# EAGLE board RS485_Breakout-Panel-v10 (EAGLE 6.6.0)
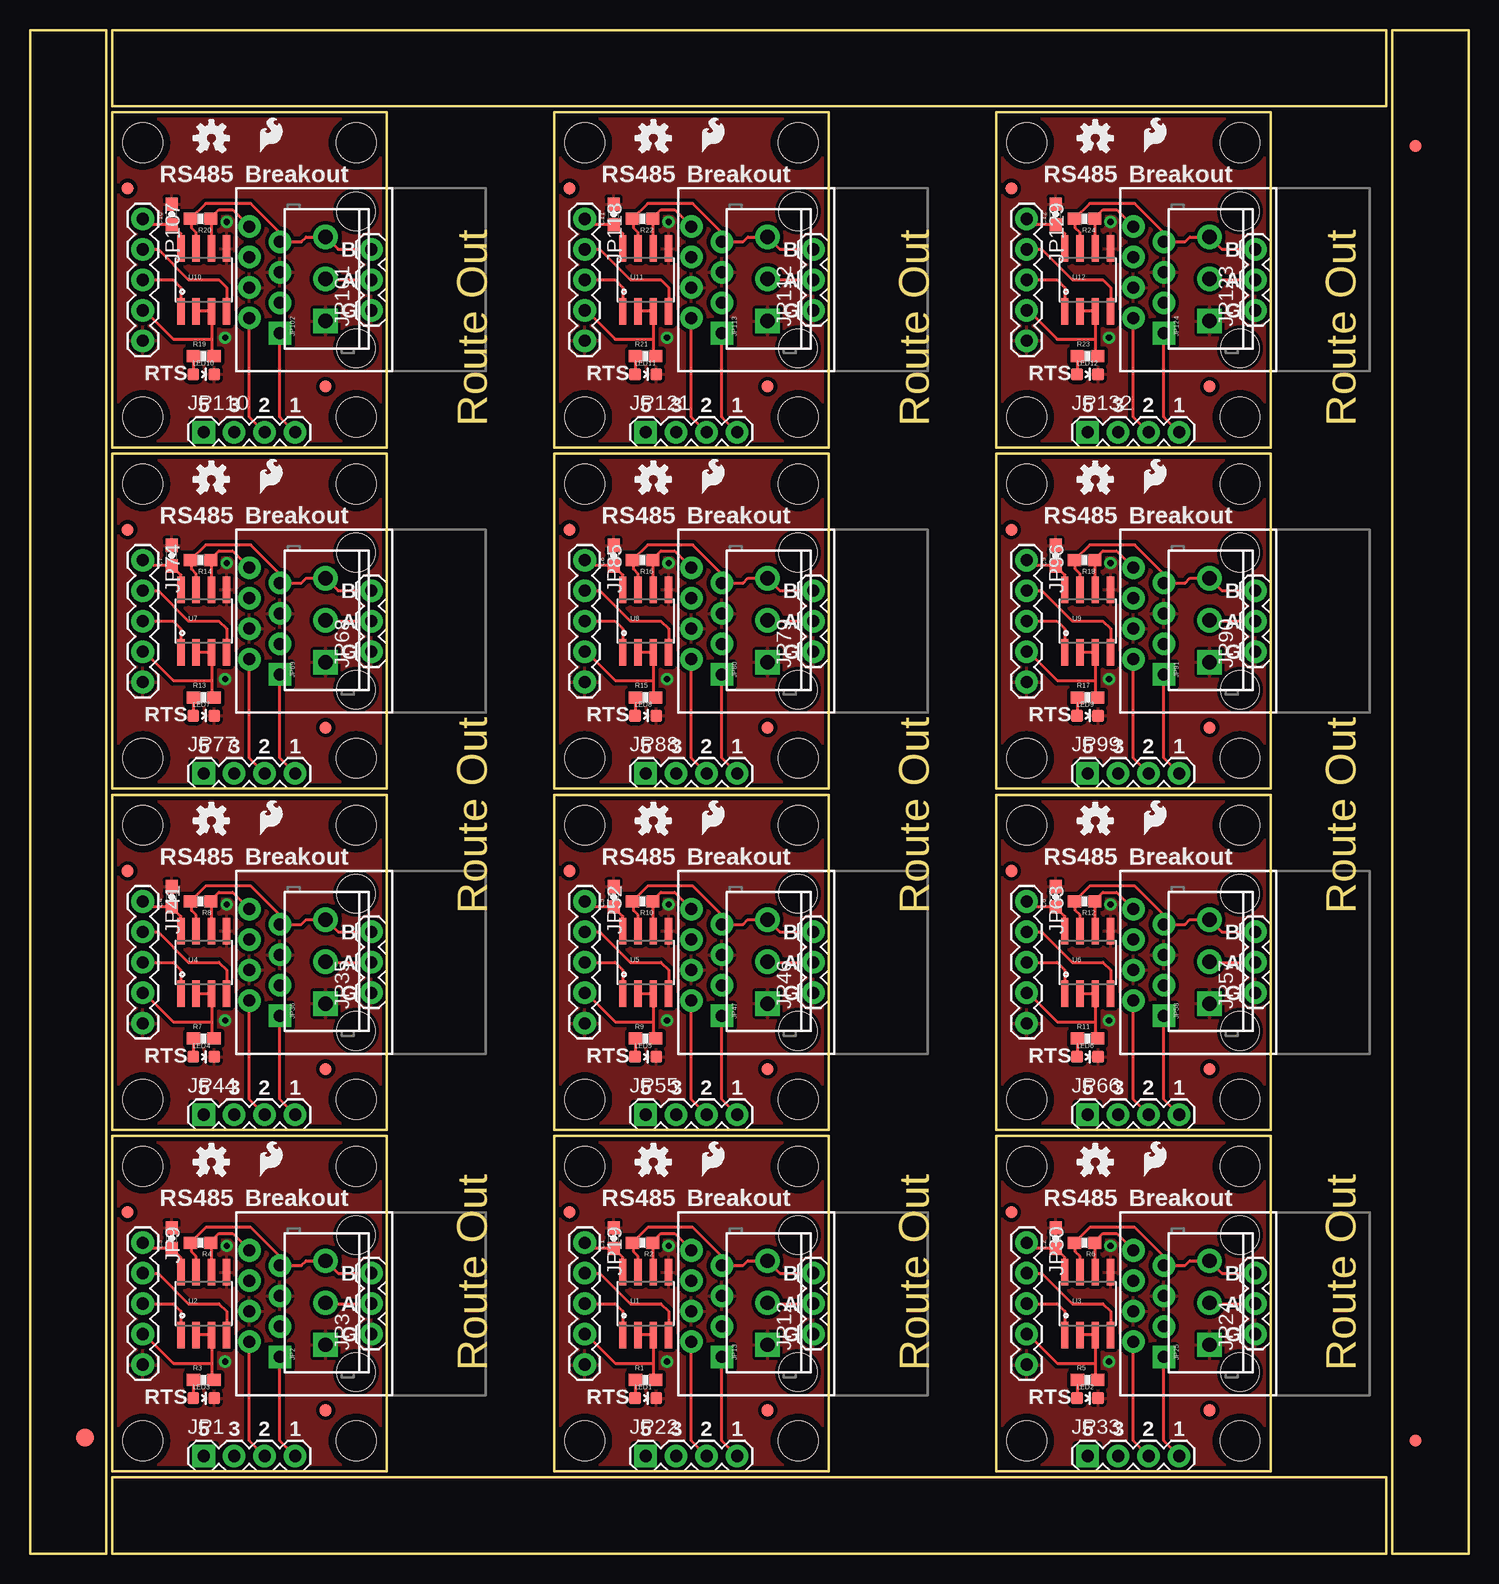
[diagram p0: board, top side]
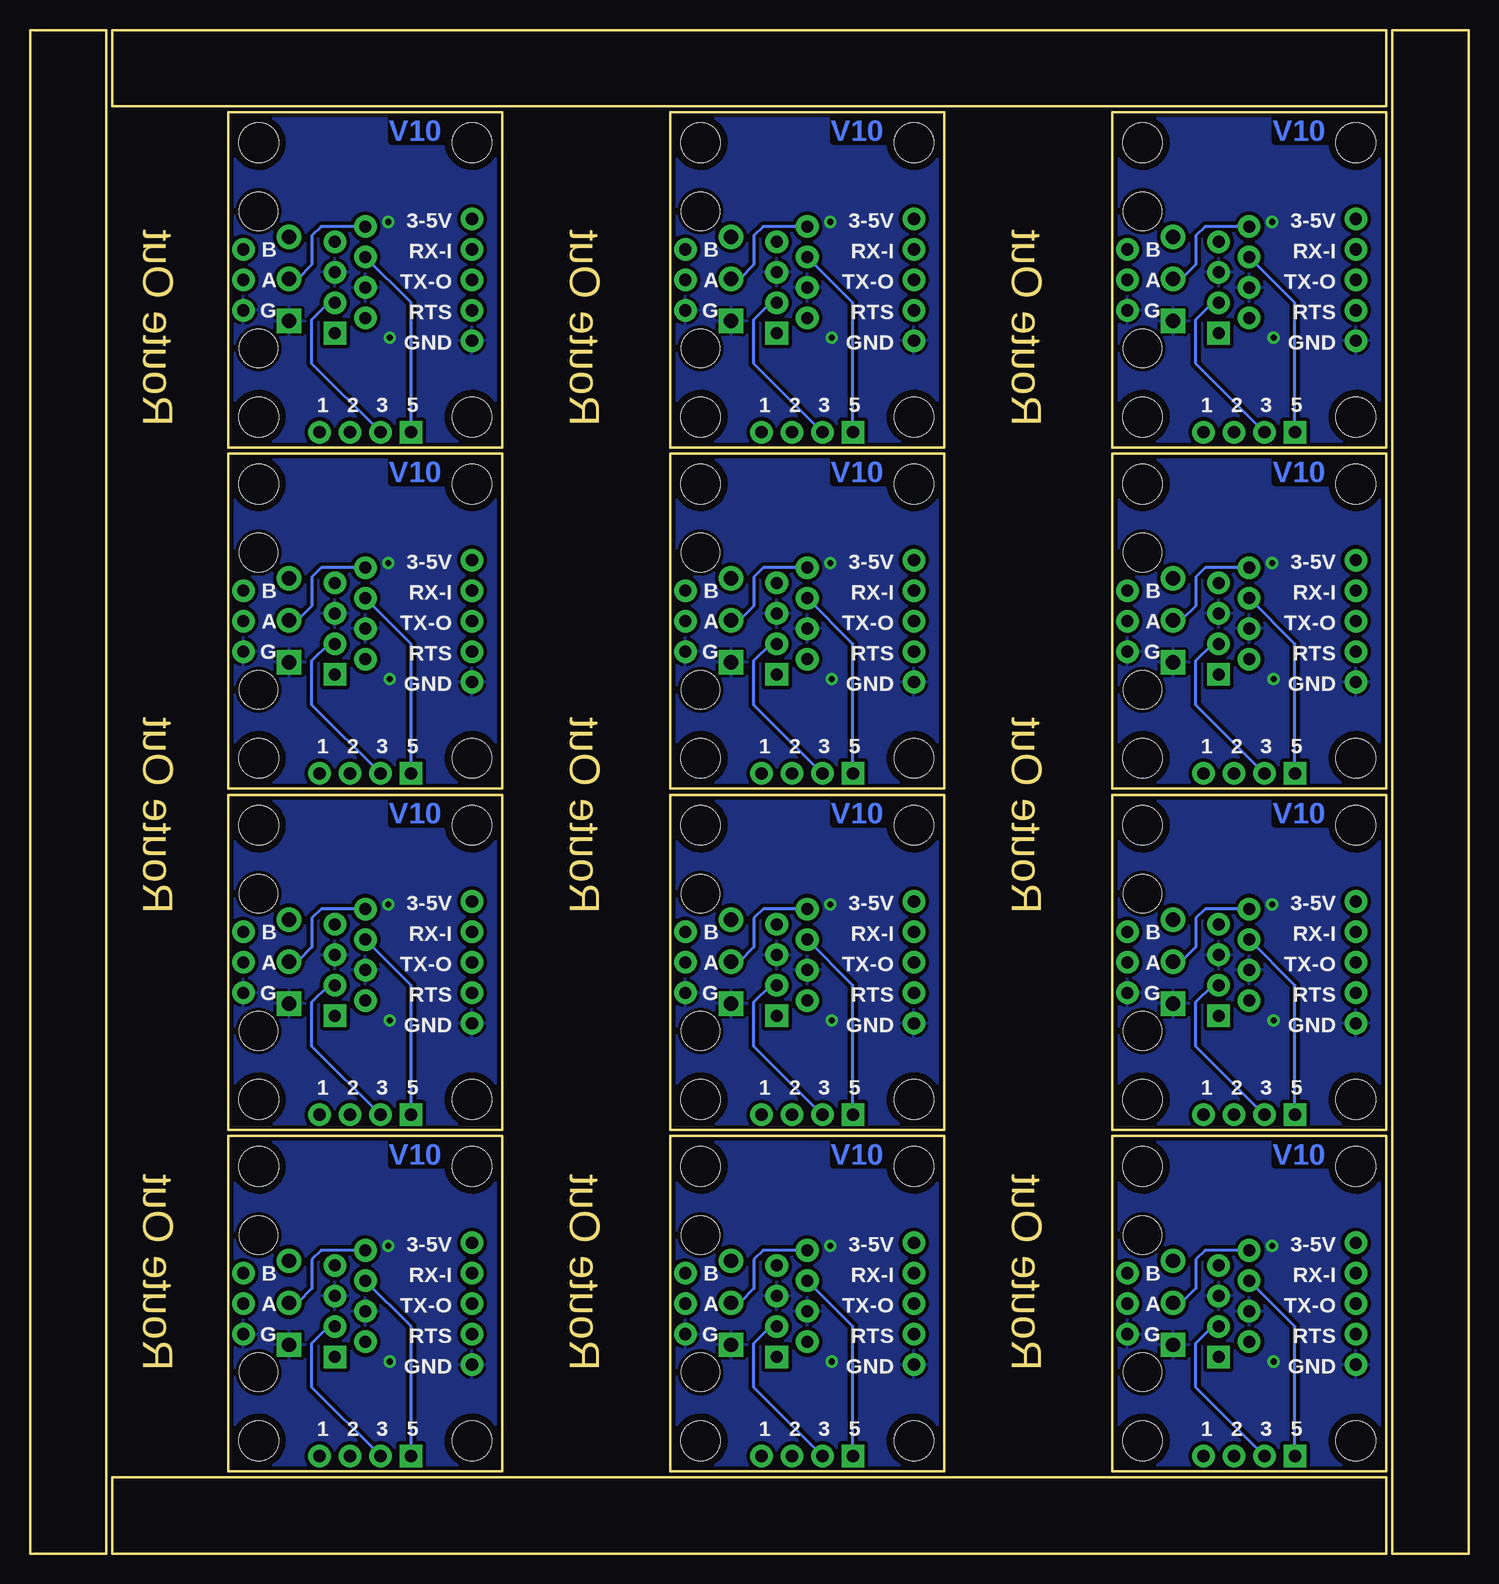
[diagram p1: board, bottom side, seen from below]

Size 119.89 x 127 mm. Coordinates in mm from the lower left corner, seen from the top.
Outline: 29.72,6.86 6.86,6.86 6.86,34.8 29.72,34.8 29.72,6.86
Outline: 66.55,6.86 43.69,6.86 43.69,34.8 66.55,34.8 66.55,6.86
Outline: 103.38,6.86 80.52,6.86 80.52,34.8 103.38,34.8 103.38,6.86
Outline: 29.72,35.31 6.86,35.31 6.86,63.25 29.72,63.25 29.72,35.31
Outline: 66.55,35.31 43.69,35.31 43.69,63.25 66.55,63.25 66.55,35.31
Outline: 103.38,35.31 80.52,35.31 80.52,63.25 103.38,63.25 103.38,35.31
Outline: 29.72,63.75 6.86,63.75 6.86,91.69 29.72,91.69 29.72,63.75
Outline: 66.55,63.75 43.69,63.75 43.69,91.69 66.55,91.69 66.55,63.75
Outline: 103.38,63.75 80.52,63.75 80.52,91.69 103.38,91.69 103.38,63.75
Outline: 29.72,92.2 6.86,92.2 6.86,120.14 29.72,120.14 29.72,92.2
Outline: 66.55,92.2 43.69,92.2 43.69,120.14 66.55,120.14 66.55,92.2
Outline: 103.38,92.2 80.52,92.2 80.52,120.14 103.38,120.14 103.38,92.2
Outline: 6.35,0 6.35,127 0,127 0,0 6.35,0
Outline: 6.86,0 113.03,0 113.03,6.35 6.86,6.35 6.86,0
Outline: 113.03,127 6.86,127 6.86,120.65 113.03,120.65 113.03,127
Outline: 119.89,0 119.89,127 113.54,127 113.54,0 119.89,0
Copper layers (1*16): Top 0.035mm / dielectric 1.5mm / Bottom 0.035mm
Design rules "SparkFun": minimum track width 8mil, minimum drill 20mil, track to track 8mil, track to pad 8mil, pad to pad 8mil, via to via 8mil, smd to smd 8mil, copper to edge 10mil, drill to drill 8mil, minimum pad ring 12mil, minimum via ring 10mil, stop-mask expansion 4mil, vias tented up to drill 20mil, thermal gap 10mil
Net classes: 0 default: width 0.203 mm; 1 power: width 0.254 mm

## Footprints (pad centres in the part's own frame; a part is rotated, then mirrored left to right if it is on the bottom)
0603-CAP = smd 1.1 x 1: 1 -0.85,0; 2 0.85,0
FIDUCIAL-1.5X3 = smd 1.5 x 1.5: 1 0,0
FIDUCIAL-1X2 = smd 1 x 1: 1 0,0
1X04 = drill 1.016 pad 1.88 square: 1 0,0 | drill 1.016 pad 1.88: 2 2.54,0; 3 5.08,0; 4 7.62,0
SCREWTERMINAL-3.5MM-3 = drill 1.2 pad 2.032 square: 1 0,0 | drill 1.2 pad 2.032: 2 3.5,0; 3 7,0
1X03 = drill 1.016 pad 1.88: 1 0,0; 2 2.54,0; 3 5.08,0
RJ45-8 = drill 1 pad 1.88 square: 1 -4.445,6.35 | drill 1 pad 1.88: 2 -3.175,8.89; 3 -1.905,6.35; 4 -0.635,8.89; 5 0.635,6.35; 6 1.905,8.89; 7 3.175,6.35; 8 4.445,8.89 | hole 3.2: -5.715,0; 5.715,0
STAND-OFF = hole 3.302: 0,0
1X05 = drill 1.016 pad 1.88: 1 0,0; 2 2.54,0; 3 5.08,0; 4 7.62,0; 5 10.16,0
LED-0603 = smd 1 x 1: A 0,-0.877; C 0,0.877
0603-RES = smd 1.1 x 1: 1 -0.85,0; 2 0.85,0
SO08 = smd 0.61 x 2.21: 1 -1.905,-2.616; 2 -0.635,-2.616; 3 0.635,-2.616; 4 1.905,-2.616; 5 1.905,2.616; 6 0.635,2.616; 7 -0.635,2.616; 8 -1.905,2.616

## Placement (x,y rotation side)
C1  0.1uF  [0603-CAP]  48.64,26.29 90 top
C2  0.1uF  [0603-CAP]  85.47,26.29 90 top
C3  0.1uF  [0603-CAP]  11.81,26.29 90 top
C4  0.1uF  [0603-CAP]  11.81,54.74 90 top
C5  0.1uF  [0603-CAP]  48.64,54.74 90 top
C6  0.1uF  [0603-CAP]  85.47,54.74 90 top
C7  0.1uF  [0603-CAP]  11.81,83.19 90 top
C8  0.1uF  [0603-CAP]  48.64,83.19 90 top
C9  0.1uF  [0603-CAP]  85.47,83.19 90 top
C10  0.1uF  [0603-CAP]  11.81,111.63 90 top
C11  0.1uF  [0603-CAP]  48.64,111.63 90 top
C12  0.1uF  [0603-CAP]  85.47,111.63 90 top
E$1  [FIDUCIAL-1.5X3]  4.57,9.65 0 top
E$7  [FIDUCIAL-1X2]  115.44,9.4 0 top
E$8  [FIDUCIAL-1X2]  115.44,117.35 180 top
JP1  [1X04]  14.48,8.13 0 top
JP2  [SCREWTERMINAL-3.5MM-3]  24.64,17.4 90 top
JP3  [1X03]  28.45,18.29 90 top
JP4  RJ45-8PTH  [RJ45-8]  27.18,20.83 90 top
JP5  FIDUCIAL1X2  [FIDUCIAL-1X2]  24.64,11.94 0 top
JP6  STAND-OFF  [STAND-OFF]  9.4,9.4 0 top
JP7  STAND-OFF  [STAND-OFF]  27.18,32.26 0 top
JP8  STAND-OFF  [STAND-OFF]  27.18,9.4 0 top
JP9  [1X05]  9.4,25.91 270 top
JP10  FIDUCIAL1X2  [FIDUCIAL-1X2]  8.13,28.45 0 top
JP11  RJ45-8PTH  [RJ45-8]  64.01,20.83 90 top
JP12  [1X03]  65.28,18.29 90 top
JP13  [SCREWTERMINAL-3.5MM-3]  61.47,17.4 90 top
JP14  STAND-OFF  [STAND-OFF]  46.23,32.26 0 top
JP15  STAND-OFF  [STAND-OFF]  9.4,32.26 0 top
JP16  STAND-OFF  [STAND-OFF]  46.23,9.4 0 top
JP17  STAND-OFF  [STAND-OFF]  64.01,32.26 0 top
JP18  STAND-OFF  [STAND-OFF]  64.01,9.4 0 top
JP19  [1X05]  46.23,25.91 270 top
JP20  FIDUCIAL1X2  [FIDUCIAL-1X2]  61.47,11.94 0 top
JP21  FIDUCIAL1X2  [FIDUCIAL-1X2]  44.96,28.45 0 top
JP22  [1X04]  51.31,8.13 0 top
JP23  RJ45-8PTH  [RJ45-8]  100.84,20.83 90 top
JP24  [1X03]  102.11,18.29 90 top
JP25  [SCREWTERMINAL-3.5MM-3]  98.3,17.4 90 top
JP26  STAND-OFF  [STAND-OFF]  83.06,32.26 0 top
JP27  STAND-OFF  [STAND-OFF]  83.06,9.4 0 top
JP28  STAND-OFF  [STAND-OFF]  100.84,32.26 0 top
JP29  STAND-OFF  [STAND-OFF]  100.84,9.4 0 top
JP30  [1X05]  83.06,25.91 270 top
JP31  FIDUCIAL1X2  [FIDUCIAL-1X2]  98.3,11.94 0 top
JP32  FIDUCIAL1X2  [FIDUCIAL-1X2]  81.79,28.45 0 top
JP33  [1X04]  88.14,8.13 0 top
JP34  RJ45-8PTH  [RJ45-8]  27.18,49.28 90 top
JP35  [1X03]  28.45,46.74 90 top
JP36  [SCREWTERMINAL-3.5MM-3]  24.64,45.85 90 top
JP37  STAND-OFF  [STAND-OFF]  9.4,60.71 0 top
JP38  STAND-OFF  [STAND-OFF]  9.4,37.85 0 top
JP39  STAND-OFF  [STAND-OFF]  27.18,60.71 0 top
JP40  STAND-OFF  [STAND-OFF]  27.18,37.85 0 top
JP41  [1X05]  9.4,54.36 270 top
JP42  FIDUCIAL1X2  [FIDUCIAL-1X2]  24.64,40.39 0 top
JP43  FIDUCIAL1X2  [FIDUCIAL-1X2]  8.13,56.9 0 top
JP44  [1X04]  14.48,36.58 0 top
JP45  RJ45-8PTH  [RJ45-8]  64.01,49.28 90 top
JP46  [1X03]  65.28,46.74 90 top
JP47  [SCREWTERMINAL-3.5MM-3]  61.47,45.85 90 top
JP48  STAND-OFF  [STAND-OFF]  46.23,60.71 0 top
JP49  STAND-OFF  [STAND-OFF]  46.23,37.85 0 top
JP50  STAND-OFF  [STAND-OFF]  64.01,60.71 0 top
JP51  STAND-OFF  [STAND-OFF]  64.01,37.85 0 top
JP52  [1X05]  46.23,54.36 270 top
JP53  FIDUCIAL1X2  [FIDUCIAL-1X2]  61.47,40.39 0 top
JP54  FIDUCIAL1X2  [FIDUCIAL-1X2]  44.96,56.9 0 top
JP55  [1X04]  51.31,36.58 0 top
JP56  RJ45-8PTH  [RJ45-8]  100.84,49.28 90 top
JP57  [1X03]  102.11,46.74 90 top
JP58  [SCREWTERMINAL-3.5MM-3]  98.3,45.85 90 top
JP59  STAND-OFF  [STAND-OFF]  83.06,60.71 0 top
JP60  STAND-OFF  [STAND-OFF]  83.06,37.85 0 top
JP61  STAND-OFF  [STAND-OFF]  100.84,60.71 0 top
JP62  STAND-OFF  [STAND-OFF]  100.84,37.85 0 top
JP63  [1X05]  83.06,54.36 270 top
JP64  FIDUCIAL1X2  [FIDUCIAL-1X2]  98.3,40.39 0 top
JP65  FIDUCIAL1X2  [FIDUCIAL-1X2]  81.79,56.9 0 top
JP66  [1X04]  88.14,36.58 0 top
JP67  RJ45-8PTH  [RJ45-8]  27.18,77.72 90 top
JP68  [1X03]  28.45,75.18 90 top
JP69  [SCREWTERMINAL-3.5MM-3]  24.64,74.3 90 top
JP70  STAND-OFF  [STAND-OFF]  9.4,89.15 0 top
JP71  STAND-OFF  [STAND-OFF]  9.4,66.29 0 top
JP72  STAND-OFF  [STAND-OFF]  27.18,89.15 0 top
JP73  STAND-OFF  [STAND-OFF]  27.18,66.29 0 top
JP74  [1X05]  9.4,82.8 270 top
JP75  FIDUCIAL1X2  [FIDUCIAL-1X2]  24.64,68.83 0 top
JP76  FIDUCIAL1X2  [FIDUCIAL-1X2]  8.13,85.34 0 top
JP77  [1X04]  14.48,65.02 0 top
JP78  RJ45-8PTH  [RJ45-8]  64.01,77.72 90 top
JP79  [1X03]  65.28,75.18 90 top
JP80  [SCREWTERMINAL-3.5MM-3]  61.47,74.3 90 top
JP81  STAND-OFF  [STAND-OFF]  46.23,89.15 0 top
JP82  STAND-OFF  [STAND-OFF]  46.23,66.29 0 top
JP83  STAND-OFF  [STAND-OFF]  64.01,89.15 0 top
JP84  STAND-OFF  [STAND-OFF]  64.01,66.29 0 top
JP85  [1X05]  46.23,82.8 270 top
JP86  FIDUCIAL1X2  [FIDUCIAL-1X2]  61.47,68.83 0 top
JP87  FIDUCIAL1X2  [FIDUCIAL-1X2]  44.96,85.34 0 top
JP88  [1X04]  51.31,65.02 0 top
JP89  RJ45-8PTH  [RJ45-8]  100.84,77.72 90 top
JP90  [1X03]  102.11,75.18 90 top
JP91  [SCREWTERMINAL-3.5MM-3]  98.3,74.3 90 top
JP92  STAND-OFF  [STAND-OFF]  83.06,89.15 0 top
JP93  STAND-OFF  [STAND-OFF]  83.06,66.29 0 top
JP94  STAND-OFF  [STAND-OFF]  100.84,89.15 0 top
JP95  STAND-OFF  [STAND-OFF]  100.84,66.29 0 top
JP96  [1X05]  83.06,82.8 270 top
JP97  FIDUCIAL1X2  [FIDUCIAL-1X2]  98.3,68.83 0 top
JP98  FIDUCIAL1X2  [FIDUCIAL-1X2]  81.79,85.34 0 top
JP99  [1X04]  88.14,65.02 0 top
JP100  RJ45-8PTH  [RJ45-8]  27.18,106.17 90 top
JP101  [1X03]  28.45,103.63 90 top
JP102  [SCREWTERMINAL-3.5MM-3]  24.64,102.74 90 top
JP103  STAND-OFF  [STAND-OFF]  9.4,117.6 0 top
JP104  STAND-OFF  [STAND-OFF]  9.4,94.74 0 top
JP105  STAND-OFF  [STAND-OFF]  27.18,117.6 0 top
JP106  STAND-OFF  [STAND-OFF]  27.18,94.74 0 top
JP107  [1X05]  9.4,111.25 270 top
JP108  FIDUCIAL1X2  [FIDUCIAL-1X2]  24.64,97.28 0 top
JP109  FIDUCIAL1X2  [FIDUCIAL-1X2]  8.13,113.79 0 top
JP110  [1X04]  14.48,93.47 0 top
JP111  RJ45-8PTH  [RJ45-8]  64.01,106.17 90 top
JP112  [1X03]  65.28,103.63 90 top
JP113  [SCREWTERMINAL-3.5MM-3]  61.47,102.74 90 top
JP114  STAND-OFF  [STAND-OFF]  46.23,117.6 0 top
JP115  STAND-OFF  [STAND-OFF]  46.23,94.74 0 top
JP116  STAND-OFF  [STAND-OFF]  64.01,117.6 0 top
JP117  STAND-OFF  [STAND-OFF]  64.01,94.74 0 top
JP118  [1X05]  46.23,111.25 270 top
JP119  FIDUCIAL1X2  [FIDUCIAL-1X2]  61.47,97.28 0 top
JP120  FIDUCIAL1X2  [FIDUCIAL-1X2]  44.96,113.79 0 top
JP121  [1X04]  51.31,93.47 0 top
JP122  RJ45-8PTH  [RJ45-8]  100.84,106.17 90 top
JP123  [1X03]  102.11,103.63 90 top
JP124  [SCREWTERMINAL-3.5MM-3]  98.3,102.74 90 top
JP125  STAND-OFF  [STAND-OFF]  83.06,117.6 0 top
JP126  STAND-OFF  [STAND-OFF]  83.06,94.74 0 top
JP127  STAND-OFF  [STAND-OFF]  100.84,117.6 0 top
JP128  STAND-OFF  [STAND-OFF]  100.84,94.74 0 top
JP129  [1X05]  83.06,111.25 270 top
JP130  FIDUCIAL1X2  [FIDUCIAL-1X2]  98.3,97.28 0 top
JP131  FIDUCIAL1X2  [FIDUCIAL-1X2]  81.79,113.79 0 top
JP132  [1X04]  88.14,93.47 0 top
LED1  Green  [LED-0603]  51.31,12.95 270 top
LED2  Green  [LED-0603]  88.14,12.95 270 top
LED3  Green  [LED-0603]  14.48,12.95 270 top
LED4  Green  [LED-0603]  14.48,41.4 270 top
LED5  Green  [LED-0603]  51.31,41.4 270 top
LED6  Green  [LED-0603]  88.14,41.4 270 top
LED7  Green  [LED-0603]  14.48,69.85 270 top
LED8  Green  [LED-0603]  51.31,69.85 270 top
LED9  Green  [LED-0603]  88.14,69.85 270 top
LED10  Green  [LED-0603]  14.48,98.3 270 top
LED11  Green  [LED-0603]  51.31,98.3 270 top
LED12  Green  [LED-0603]  88.14,98.3 270 top
LOGO1  OSHW-LOGOS  [OSHW-LOGO-S]  15.11,32.64 0 top
LOGO2  OSHW-LOGOS  [OSHW-LOGO-S]  51.94,32.64 0 top
LOGO3  OSHW-LOGOS  [OSHW-LOGO-S]  88.77,32.64 0 top
LOGO4  OSHW-LOGOS  [OSHW-LOGO-S]  15.11,61.09 0 top
LOGO5  OSHW-LOGOS  [OSHW-LOGO-S]  51.94,61.09 0 top
LOGO6  OSHW-LOGOS  [OSHW-LOGO-S]  88.77,61.09 0 top
LOGO7  OSHW-LOGOS  [OSHW-LOGO-S]  15.11,89.53 0 top
LOGO8  OSHW-LOGOS  [OSHW-LOGO-S]  51.94,89.53 0 top
LOGO9  OSHW-LOGOS  [OSHW-LOGO-S]  88.77,89.53 0 top
LOGO10  OSHW-LOGOS  [OSHW-LOGO-S]  15.11,117.98 0 top
LOGO11  OSHW-LOGOS  [OSHW-LOGO-S]  51.94,117.98 0 top
LOGO12  OSHW-LOGOS  [OSHW-LOGO-S]  88.77,117.98 0 top
R1  330  [0603-RES]  51.31,14.48 0 top
R2  220  [0603-RES]  51.05,25.91 180 top
R3  330  [0603-RES]  14.48,14.48 0 top
R4  220  [0603-RES]  14.22,25.91 180 top
R5  330  [0603-RES]  88.14,14.48 0 top
R6  220  [0603-RES]  87.88,25.91 180 top
R7  330  [0603-RES]  14.48,42.93 0 top
R8  220  [0603-RES]  14.22,54.36 180 top
R9  330  [0603-RES]  51.31,42.93 0 top
R10  220  [0603-RES]  51.05,54.36 180 top
R11  330  [0603-RES]  88.14,42.93 0 top
R12  220  [0603-RES]  87.88,54.36 180 top
R13  330  [0603-RES]  14.48,71.37 0 top
R14  220  [0603-RES]  14.22,82.8 180 top
R15  330  [0603-RES]  51.31,71.37 0 top
R16  220  [0603-RES]  51.05,82.8 180 top
R17  330  [0603-RES]  88.14,71.37 0 top
R18  220  [0603-RES]  87.88,82.8 180 top
R19  330  [0603-RES]  14.48,99.82 0 top
R20  220  [0603-RES]  14.22,111.25 180 top
R21  330  [0603-RES]  51.31,99.82 0 top
R22  220  [0603-RES]  51.05,111.25 180 top
R23  330  [0603-RES]  88.14,99.82 0 top
R24  220  [0603-RES]  87.88,111.25 180 top
U1  RS485SOIC  [SO08]  51.31,20.83 0 top
U2  RS485SOIC  [SO08]  14.48,20.83 0 top
U3  RS485SOIC  [SO08]  88.14,20.83 0 top
U4  RS485SOIC  [SO08]  14.48,49.28 0 top
U5  RS485SOIC  [SO08]  51.31,49.28 0 top
U6  RS485SOIC  [SO08]  88.14,49.28 0 top
U7  RS485SOIC  [SO08]  14.48,77.72 0 top
U8  RS485SOIC  [SO08]  51.31,77.72 0 top
U9  RS485SOIC  [SO08]  88.14,77.72 0 top
U10  RS485SOIC  [SO08]  14.48,106.17 0 top
U11  RS485SOIC  [SO08]  51.31,106.17 0 top
U12  RS485SOIC  [SO08]  88.14,106.17 0 top
U$1  LOGO-SFESK  [SFE-LOGO-FLAME]  56.01,31.5 0 top
U$2  LOGO-SFESK  [SFE-LOGO-FLAME]  19.18,31.5 0 top
U$3  LOGO-SFESK  [SFE-LOGO-FLAME]  92.84,31.5 0 top
U$4  LOGO-SFESK  [SFE-LOGO-FLAME]  19.18,59.94 0 top
U$5  LOGO-SFESK  [SFE-LOGO-FLAME]  56.01,59.94 0 top
U$6  LOGO-SFESK  [SFE-LOGO-FLAME]  92.84,59.94 0 top
U$7  LOGO-SFESK  [SFE-LOGO-FLAME]  19.18,88.39 0 top
U$8  LOGO-SFESK  [SFE-LOGO-FLAME]  56.01,88.39 0 top
U$9  LOGO-SFESK  [SFE-LOGO-FLAME]  92.84,88.39 0 top
U$10  LOGO-SFESK  [SFE-LOGO-FLAME]  19.18,116.84 0 top
U$11  LOGO-SFESK  [SFE-LOGO-FLAME]  56.01,116.84 0 top
U$12  LOGO-SFESK  [SFE-LOGO-FLAME]  92.84,116.84 0 top

## Library data of the parts
C1-C12 = SparkFun-Capacitors; PROD_ID: CAP-00810
E$1 = SparkFun-Retired
E$7 E$8 LOGO1-LOGO12 = SparkFun-Aesthetics
JP1-JP132 U1-U12 U$1-U$12 = SparkFun
LED1-LED12 = SparkFun-LED; PROD_ID: DIO-00821
R1 R3 R5 R7 R9 R11 R13 R15 R17 R19 R21 R23 = SparkFun-Resistors; PROD_ID: RES-00818
R2 R4 R6 R8 R10 R12 R14 R16 R18 R20 R22 R24 = SparkFun-Resistors; PROD_ID: RES-08698

## Nets
1: JP1.4 JP4.1
2: JP1.3 JP4.2
3: JP1.2 JP4.3
4: JP11.1 JP22.4
5: JP1.1 JP4.6
6: JP11.2 JP22.3
7: JP11.3 JP22.2
8: JP11.6 JP22.1
9: JP23.1 JP33.4
10: JP23.2 JP33.3
11: JP23.3 JP33.2
12: JP23.6 JP33.1
13: JP34.1 JP44.4
14: JP34.2 JP44.3
15: JP34.3 JP44.2
16: JP34.6 JP44.1
17: JP45.1 JP55.4
18: JP45.2 JP55.3
19: JP45.3 JP55.2
20: JP45.6 JP55.1
21: JP56.1 JP66.4
22: JP56.2 JP66.3
23: JP56.3 JP66.2
24: JP56.6 JP66.1
25: JP67.1 JP77.4
26: JP67.2 JP77.3
27: JP67.3 JP77.2
28: JP67.6 JP77.1
29: JP78.1 JP88.4
30: JP78.2 JP88.3
31: JP78.3 JP88.2
32: JP78.6 JP88.1
33: JP89.1 JP99.4
34: JP89.2 JP99.3
35: JP89.3 JP99.2
36: JP89.6 JP99.1
37: JP100.1 JP110.4
38: JP100.2 JP110.3
39: JP100.3 JP110.2
40: JP100.6 JP110.1
41: JP111.1 JP121.4
42: JP111.2 JP121.3
43: JP111.3 JP121.2
44: JP111.6 JP121.1
45: JP122.1 JP132.4
46: JP122.2 JP132.3
47: JP122.3 JP132.2
48: JP122.6 JP132.1
A: JP2.2 JP3.2 JP4.8 R4.1 U2.6
A1: JP11.8 JP12.2 JP13.2 R2.1 U1.6
A2: JP23.8 JP24.2 JP25.2 R6.1 U3.6
A3: JP34.8 JP35.2 JP36.2 R8.1 U4.6
A4: JP45.8 JP46.2 JP47.2 R10.1 U5.6
A5: JP56.8 JP57.2 JP58.2 R12.1 U6.6
A6: JP67.8 JP68.2 JP69.2 R14.1 U7.6
A7: JP78.8 JP79.2 JP80.2 R16.1 U8.6
A8: JP89.8 JP90.2 JP91.2 R18.1 U9.6
A9: JP100.8 JP101.2 JP102.2 R20.1 U10.6
A10: JP111.8 JP112.2 JP113.2 R22.1 U11.6
A11: JP122.8 JP123.2 JP124.2 R24.1 U12.6
B: JP2.3 JP3.3 JP4.7 R4.2 U2.7
B1: JP11.7 JP12.3 JP13.3 R2.2 U1.7
B2: JP23.7 JP24.3 JP25.3 R6.2 U3.7
B3: JP34.7 JP35.3 JP36.3 R8.2 U4.7
B4: JP45.7 JP46.3 JP47.3 R10.2 U5.7
B5: JP56.7 JP57.3 JP58.3 R12.2 U6.7
B6: JP67.7 JP68.3 JP69.3 R14.2 U7.7
B7: JP78.7 JP79.3 JP80.3 R16.2 U8.7
B8: JP89.7 JP90.3 JP91.3 R18.2 U9.7
B9: JP100.7 JP101.3 JP102.3 R20.2 U10.7
B10: JP111.7 JP112.3 JP113.3 R22.2 U11.7
B11: JP122.7 JP123.3 JP124.3 R24.2 U12.7
GND [power]: C3.2 JP2.1 JP3.1 JP4.4 JP4.5 JP9.5 LED3.C U2.5
GND1 [power]: C1.2 JP11.4 JP11.5 JP12.1 JP13.1 JP19.5 LED1.C U1.5
GND2 [power]: C2.2 JP23.4 JP23.5 JP24.1 JP25.1 JP30.5 LED2.C U3.5
GND3 [power]: C4.2 JP34.4 JP34.5 JP35.1 JP36.1 JP41.5 LED4.C U4.5
GND4 [power]: C5.2 JP45.4 JP45.5 JP46.1 JP47.1 JP52.5 LED5.C U5.5
GND5 [power]: C6.2 JP56.4 JP56.5 JP57.1 JP58.1 JP63.5 LED6.C U6.5
GND6 [power]: C7.2 JP67.4 JP67.5 JP68.1 JP69.1 JP74.5 LED7.C U7.5
GND7 [power]: C8.2 JP78.4 JP78.5 JP79.1 JP80.1 JP85.5 LED8.C U8.5
GND8 [power]: C9.2 JP89.4 JP89.5 JP90.1 JP91.1 JP96.5 LED9.C U9.5
GND9 [power]: C10.2 JP100.4 JP100.5 JP101.1 JP102.1 JP107.5 LED10.C U10.5
GND10 [power]: C11.2 JP111.4 JP111.5 JP112.1 JP113.1 JP118.5 LED11.C U11.5
GND11 [power]: C12.2 JP122.4 JP122.5 JP123.1 JP124.1 JP129.5 LED12.C U12.5
N$1: LED1.A R1.1
N$2: LED2.A R5.1
N$3: LED4.A R7.1
N$4: LED3.A R3.1
N$5: LED5.A R9.1
N$6: LED6.A R11.1
N$7: LED7.A R13.1
N$8: LED8.A R15.1
N$9: LED9.A R17.1
N$10: LED10.A R19.1
N$11: LED11.A R21.1
N$12: LED12.A R23.1
RTS: JP9.4 R3.2 U2.2 U2.3
RTS1: JP19.4 R1.2 U1.2 U1.3
RTS2: JP30.4 R5.2 U3.2 U3.3
RTS3: JP41.4 R7.2 U4.2 U4.3
RTS4: JP52.4 R9.2 U5.2 U5.3
RTS5: JP63.4 R11.2 U6.2 U6.3
RTS6: JP74.4 R13.2 U7.2 U7.3
RTS7: JP85.4 R15.2 U8.2 U8.3
RTS8: JP96.4 R17.2 U9.2 U9.3
RTS9: JP107.4 R19.2 U10.2 U10.3
RTS10: JP118.4 R21.2 U11.2 U11.3
RTS11: JP129.4 R23.2 U12.2 U12.3
RX-I: JP9.2 U2.4
RX-I1: JP19.2 U1.4
RX-I2: JP30.2 U3.4
RX-I3: JP41.2 U4.4
RX-I4: JP52.2 U5.4
RX-I5: JP63.2 U6.4
RX-I6: JP74.2 U7.4
RX-I7: JP85.2 U8.4
RX-I8: JP96.2 U9.4
RX-I9: JP107.2 U10.4
RX-I10: JP118.2 U11.4
RX-I11: JP129.2 U12.4
TX-O: JP9.3 U2.1
TX-O1: JP19.3 U1.1
TX-O2: JP30.3 U3.1
TX-O3: JP41.3 U4.1
TX-O4: JP52.3 U5.1
TX-O5: JP63.3 U6.1
TX-O6: JP74.3 U7.1
TX-O7: JP85.3 U8.1
TX-O8: JP96.3 U9.1
TX-O9: JP107.3 U10.1
TX-O10: JP118.3 U11.1
TX-O11: JP129.3 U12.1
VCC [power]: C3.1 JP9.1 U2.8
VCC1 [power]: C1.1 JP19.1 U1.8
VCC2 [power]: C2.1 JP30.1 U3.8
VCC3 [power]: C4.1 JP41.1 U4.8
VCC4 [power]: C5.1 JP52.1 U5.8
VCC5 [power]: C6.1 JP63.1 U6.8
VCC6 [power]: C7.1 JP74.1 U7.8
VCC7 [power]: C8.1 JP85.1 U8.8
VCC8 [power]: C9.1 JP96.1 U9.8
VCC9 [power]: C10.1 JP107.1 U10.8
VCC10 [power]: C11.1 JP118.1 U11.8
VCC11 [power]: C12.1 JP129.1 U12.8

## Tracks (layer width: path | path; a pad name or v marks a point on that pad's centre or on a via)
1
  Top 0.254: JP4.1 20.83,9.4 JP1.4
2
  Top 0.254: JP4.2 18.29,9.4 JP1.3
3
  Bottom 0.254: JP4.3 21.34,18.92 22.73,17.53 22.73,13.84 JP1.2
4
  Top 0.254: JP11.1 57.66,9.4 JP22.4
5
  Bottom 0.254: JP4.6 14.48,18.92 JP1.1
6
  Top 0.254: JP11.2 55.12,9.4 JP22.3
7
  Bottom 0.254: JP11.3 58.17,18.92 59.56,17.53 59.56,13.84 JP22.2
8
  Bottom 0.254: JP11.6 51.31,18.92 JP22.1
9
  Top 0.254: JP23.1 94.49,9.4 JP33.4
10
  Top 0.254: JP23.2 91.95,9.4 JP33.3
11
  Bottom 0.254: JP23.3 95,18.92 96.39,17.53 96.39,13.84 JP33.2
12
  Bottom 0.254: JP23.6 88.14,18.92 JP33.1
13
  Top 0.254: JP34.1 20.83,37.85 JP44.4
14
  Top 0.254: JP34.2 18.29,37.85 JP44.3
15
  Bottom 0.254: JP34.3 21.34,47.37 22.73,45.97 22.73,42.29 JP44.2
16
  Bottom 0.254: JP34.6 14.48,47.37 JP44.1
17
  Top 0.254: JP45.1 57.66,37.85 JP55.4
18
  Top 0.254: JP45.2 55.12,37.85 JP55.3
19
  Bottom 0.254: JP45.3 58.17,47.37 59.56,45.97 59.56,42.29 JP55.2
20
  Bottom 0.254: JP45.6 51.31,47.37 JP55.1
21
  Top 0.254: JP56.1 94.49,37.85 JP66.4
22
  Top 0.254: JP56.2 91.95,37.85 JP66.3
23
  Bottom 0.254: JP56.3 95,47.37 96.39,45.97 96.39,42.29 JP66.2
24
  Bottom 0.254: JP56.6 88.14,47.37 JP66.1
25
  Top 0.254: JP67.1 20.83,66.29 JP77.4
26
  Top 0.254: JP67.2 18.29,66.29 JP77.3
27
  Bottom 0.254: JP67.3 21.34,75.82 22.73,74.42 22.73,70.74 JP77.2
28
  Bottom 0.254: JP67.6 14.48,75.82 JP77.1
29
  Top 0.254: JP78.1 57.66,66.29 JP88.4
30
  Top 0.254: JP78.2 55.12,66.29 JP88.3
31
  Bottom 0.254: JP78.3 58.17,75.82 59.56,74.42 59.56,70.74 JP88.2
32
  Bottom 0.254: JP78.6 51.31,75.82 JP88.1
33
  Top 0.254: JP89.1 94.49,66.29 JP99.4
34
  Top 0.254: JP89.2 91.95,66.29 JP99.3
35
  Bottom 0.254: JP89.3 95,75.82 96.39,74.42 96.39,70.74 JP99.2
36
  Bottom 0.254: JP89.6 88.14,75.82 JP99.1
37
  Top 0.254: JP100.1 20.83,94.74 JP110.4
38
  Top 0.254: JP100.2 18.29,94.74 JP110.3
39
  Bottom 0.254: JP100.3 21.34,104.27 22.73,102.87 22.73,99.19 JP110.2
40
  Bottom 0.254: JP100.6 14.48,104.27 JP110.1
41
  Top 0.254: JP111.1 57.66,94.74 JP121.4
42
  Top 0.254: JP111.2 55.12,94.74 JP121.3
43
  Bottom 0.254: JP111.3 58.17,104.27 59.56,102.87 59.56,99.19 JP121.2
44
  Bottom 0.254: JP111.6 51.31,104.27 JP121.1
45
  Top 0.254: JP122.1 94.49,94.74 JP132.4
46
  Top 0.254: JP122.2 91.95,94.74 JP132.3
47
  Bottom 0.254: JP122.3 95,104.27 96.39,102.87 96.39,99.19 JP132.2
48
  Bottom 0.254: JP122.6 88.14,104.27 JP132.1
A
  Top 0.254: JP3.2 24.71,20.83 JP2.2 | U2.6 15.13,23.46 15.13,25.85 R4.1 15.24,25.91 15.24,26.16 15.75,26.67 16.89,26.67 JP4.8
  Bottom 0.254: JP2.2 23.93,20.9 22.73,22.1 22.73,24.51 21.97,25.27 JP4.8
A1
  Top 0.254: JP12.2 61.54,20.83 JP13.2 | U1.6 51.96,23.46 51.96,25.85 R2.1 52.07,25.91 52.07,26.16 52.58,26.67 53.72,26.67 JP11.8
  Bottom 0.254: JP13.2 60.76,20.9 59.56,22.1 59.56,24.51 58.8,25.27 JP11.8
A2
  Top 0.254: JP24.2 98.37,20.83 JP25.2 | U3.6 88.79,23.46 88.79,25.85 R6.1 88.9,25.91 88.9,26.16 89.41,26.67 90.55,26.67 JP23.8
  Bottom 0.254: JP25.2 97.59,20.9 96.39,22.1 96.39,24.51 95.63,25.27 JP23.8
A3
  Top 0.254: JP35.2 24.71,49.28 JP36.2 | U4.6 15.13,51.91 15.13,54.3 R8.1 15.24,54.36 15.24,54.61 15.75,55.12 16.89,55.12 JP34.8
  Bottom 0.254: JP36.2 23.93,49.35 22.73,50.55 22.73,52.96 21.97,53.72 JP34.8
A4
  Top 0.254: JP46.2 61.54,49.28 JP47.2 | U5.6 51.96,51.91 51.96,54.3 R10.1 52.07,54.36 52.07,54.61 52.58,55.12 53.72,55.12 JP45.8
  Bottom 0.254: JP47.2 60.76,49.35 59.56,50.55 59.56,52.96 58.8,53.72 JP45.8
A5
  Top 0.254: JP57.2 98.37,49.28 JP58.2 | U6.6 88.79,51.91 88.79,54.3 R12.1 88.9,54.36 88.9,54.61 89.41,55.12 90.55,55.12 JP56.8
  Bottom 0.254: JP58.2 97.59,49.35 96.39,50.55 96.39,52.96 95.63,53.72 JP56.8
A6
  Top 0.254: JP68.2 24.71,77.72 JP69.2 | U7.6 15.13,80.36 15.13,82.75 R14.1 15.24,82.8 15.24,83.06 15.75,83.57 16.89,83.57 JP67.8
  Bottom 0.254: JP69.2 23.93,77.8 22.73,78.99 22.73,81.41 21.97,82.17 JP67.8
A7
  Top 0.254: JP79.2 61.54,77.72 JP80.2 | U8.6 51.96,80.36 51.96,82.75 R16.1 52.07,82.8 52.07,83.06 52.58,83.57 53.72,83.57 JP78.8
  Bottom 0.254: JP80.2 60.76,77.8 59.56,78.99 59.56,81.41 58.8,82.17 JP78.8
A8
  Top 0.254: JP90.2 98.37,77.72 JP91.2 | U9.6 88.79,80.36 88.79,82.75 R18.1 88.9,82.8 88.9,83.06 89.41,83.57 90.55,83.57 JP89.8
  Bottom 0.254: JP91.2 97.59,77.8 96.39,78.99 96.39,81.41 95.63,82.17 JP89.8
A9
  Top 0.254: JP101.2 24.71,106.17 JP102.2 | U10.6 15.13,108.8 15.13,111.2 R20.1 15.24,111.25 15.24,111.51 15.75,112.01 16.89,112.01 JP100.8
  Bottom 0.254: JP102.2 23.93,106.24 22.73,107.44 22.73,109.86 21.97,110.62 JP100.8
A10
  Top 0.254: JP112.2 61.54,106.17 JP113.2 | U11.6 51.96,108.8 51.96,111.2 R22.1 52.07,111.25 52.07,111.51 52.58,112.01 53.72,112.01 JP111.8
  Bottom 0.254: JP113.2 60.76,106.24 59.56,107.44 59.56,109.86 58.8,110.62 JP111.8
A11
  Top 0.254: JP123.2 98.37,106.17 JP124.2 | U12.6 88.79,108.8 88.79,111.2 R24.1 88.9,111.25 88.9,111.51 89.41,112.01 90.55,112.01 JP122.8
  Bottom 0.254: JP124.2 97.59,106.24 96.39,107.44 96.39,109.86 95.63,110.62 JP122.8
B
  Top 0.254: 13.84,25.89 R4.2 | R4.2 14.64,27.18 18.41,27.18 20.83,24.77 JP4.7 22.61,24 23,24.4 JP2.3 25.67,23.37 JP3.3 | U2.7 13.84,24.77 13.46,25.15 13.46,25.82 R4.2
B1
  Top 0.254: 50.67,25.89 R2.2 | R2.2 51.47,27.18 55.24,27.18 57.66,24.77 JP11.7 59.44,24 59.83,24.4 JP13.3 62.5,23.37 JP12.3 | U1.7 50.67,24.77 50.29,25.15 50.29,25.82 R2.2
B2
  Top 0.254: 87.5,25.89 R6.2 | R6.2 88.3,27.18 92.08,27.18 94.49,24.77 JP23.7 96.27,24 96.66,24.4 JP25.3 99.33,23.37 JP24.3 | U3.7 87.5,24.77 87.12,25.15 87.12,25.82 R6.2
B3
  Top 0.254: 13.84,54.34 R8.2 | R8.2 14.64,55.63 18.41,55.63 20.83,53.21 JP34.7 22.61,52.45 23,52.85 JP36.3 25.67,51.82 JP35.3 | U4.7 13.84,53.21 13.46,53.59 13.46,54.27 R8.2
B4
  Top 0.254: 50.67,54.34 R10.2 | R10.2 51.47,55.63 55.24,55.63 57.66,53.21 JP45.7 59.44,52.45 59.83,52.85 JP47.3 62.5,51.82 JP46.3 | U5.7 50.67,53.21 50.29,53.59 50.29,54.27 R10.2
B5
  Top 0.254: 87.5,54.34 R12.2 | R12.2 88.3,55.63 92.08,55.63 94.49,53.21 JP56.7 96.27,52.45 96.66,52.85 JP58.3 99.33,51.82 JP57.3 | U6.7 87.5,53.21 87.12,53.59 87.12,54.27 R12.2
B6
  Top 0.254: 13.84,82.79 R14.2 | R14.2 14.64,84.07 18.41,84.07 20.83,81.66 JP67.7 22.61,80.9 23,81.3 JP69.3 25.67,80.26 JP68.3 | U7.7 13.84,81.66 13.46,82.04 13.46,82.72 R14.2
B7
  Top 0.254: 50.67,82.79 R16.2 | R16.2 51.47,84.07 55.24,84.07 57.66,81.66 JP78.7 59.44,80.9 59.83,81.3 JP80.3 62.5,80.26 JP79.3 | U8.7 50.67,81.66 50.29,82.04 50.29,82.72 R16.2
B8
  Top 0.254: 87.5,82.79 R18.2 | R18.2 88.3,84.07 92.08,84.07 94.49,81.66 JP89.7 96.27,80.9 96.66,81.3 JP91.3 99.33,80.26 JP90.3 | U9.7 87.5,81.66 87.12,82.04 87.12,82.72 R18.2
B9
  Top 0.254: 13.84,111.24 R20.2 | R20.2 14.64,112.52 18.41,112.52 20.83,110.11 JP100.7 22.61,109.35 23,109.74 JP102.3 25.67,108.71 JP101.3 | U10.7 13.84,110.11 13.46,110.49 13.46,111.16 R20.2
B10
  Top 0.254: 50.67,111.24 R22.2 | R22.2 51.47,112.52 55.24,112.52 57.66,110.11 JP111.7 59.44,109.35 59.83,109.74 JP113.3 62.5,108.71 JP112.3 | U11.7 50.67,110.11 50.29,110.49 50.29,111.16 R22.2
B11
  Top 0.254: 87.5,111.24 R24.2 | R24.2 88.3,112.52 92.08,112.52 94.49,110.11 JP122.7 96.27,109.35 96.66,109.74 JP124.3 99.33,108.71 JP123.3 | U12.7 87.5,110.11 87.12,110.49 87.12,111.16 R24.2
GND  (via drill 0.51)
  other vias: 16.26,16 16.38,25.65
  pour Bottom (isolate 0.305): 29.72,34.8 29.72,6.86 6.86,6.86 6.86,34.8
  pour Top (isolate 0.305): 29.72,34.8 29.72,6.86 6.86,6.86 6.86,34.8
GND1  (via drill 0.51)
  other vias: 53.09,16 53.21,25.65
  pour Bottom (isolate 0.305): 66.55,34.8 66.55,6.86 43.69,6.86 43.69,34.8
  pour Top (isolate 0.305): 66.55,34.8 66.55,6.86 43.69,6.86 43.69,34.8
GND2  (via drill 0.51)
  other vias: 89.92,16 90.04,25.65
  pour Bottom (isolate 0.305): 103.38,34.8 103.38,6.86 80.52,6.86 80.52,34.8
  pour Top (isolate 0.305): 103.38,34.8 103.38,6.86 80.52,6.86 80.52,34.8
GND3  (via drill 0.51)
  other vias: 16.26,44.45 16.38,54.1
  pour Bottom (isolate 0.305): 29.72,63.25 29.72,35.31 6.86,35.31 6.86,63.25
  pour Top (isolate 0.305): 29.72,63.25 29.72,35.31 6.86,35.31 6.86,63.25
GND4  (via drill 0.51)
  other vias: 53.09,44.45 53.21,54.1
  pour Bottom (isolate 0.305): 66.55,63.25 66.55,35.31 43.69,35.31 43.69,63.25
  pour Top (isolate 0.305): 66.55,63.25 66.55,35.31 43.69,35.31 43.69,63.25
GND5  (via drill 0.51)
  other vias: 89.92,44.45 90.04,54.1
  pour Bottom (isolate 0.305): 103.38,63.25 103.38,35.31 80.52,35.31 80.52,63.25
  pour Top (isolate 0.305): 103.38,63.25 103.38,35.31 80.52,35.31 80.52,63.25
GND6  (via drill 0.51)
  other vias: 16.26,72.9 16.38,82.55
  pour Bottom (isolate 0.305): 29.72,91.69 29.72,63.75 6.86,63.75 6.86,91.69
  pour Top (isolate 0.305): 29.72,91.69 29.72,63.75 6.86,63.75 6.86,91.69
GND7  (via drill 0.51)
  other vias: 53.09,72.9 53.21,82.55
  pour Bottom (isolate 0.305): 66.55,91.69 66.55,63.75 43.69,63.75 43.69,91.69
  pour Top (isolate 0.305): 66.55,91.69 66.55,63.75 43.69,63.75 43.69,91.69
GND8  (via drill 0.51)
  other vias: 89.92,72.9 90.04,82.55
  pour Bottom (isolate 0.305): 103.38,91.69 103.38,63.75 80.52,63.75 80.52,91.69
  pour Top (isolate 0.305): 103.38,91.69 103.38,63.75 80.52,63.75 80.52,91.69
GND9  (via drill 0.51)
  other vias: 16.26,101.35 16.38,111
  pour Bottom (isolate 0.305): 29.72,120.14 29.72,92.2 6.86,92.2 6.86,120.14
  pour Top (isolate 0.305): 29.72,120.14 29.72,92.2 6.86,92.2 6.86,120.14
GND10  (via drill 0.51)
  other vias: 53.09,101.35 53.21,111
  pour Bottom (isolate 0.305): 66.55,120.14 66.55,92.2 43.69,92.2 43.69,120.14
  pour Top (isolate 0.305): 66.55,120.14 66.55,92.2 43.69,92.2 43.69,120.14
GND11  (via drill 0.51)
  other vias: 89.92,101.35 90.04,111
  pour Bottom (isolate 0.305): 103.38,120.14 103.38,92.2 80.52,92.2 80.52,120.14
  pour Top (isolate 0.305): 103.38,120.14 103.38,92.2 80.52,92.2 80.52,120.14
N$1
  Top 0.254: 50.66,13.31 LED1.A 50.43,14.45 R1.1
N$2
  Top 0.254: 87.49,13.31 LED2.A 87.26,14.45 R5.1
N$3
  Top 0.254: 13.83,41.76 LED4.A 13.6,42.9 R7.1
N$4
  Top 0.254: 13.83,13.31 LED3.A 13.6,14.45 R3.1
N$5
  Top 0.254: 50.66,41.76 LED5.A 50.43,42.9 R9.1
N$6
  Top 0.254: 87.49,41.76 LED6.A 87.26,42.9 R11.1
N$7
  Top 0.254: 13.83,70.2 LED7.A 13.6,71.35 R13.1
N$8
  Top 0.254: 50.66,70.2 LED8.A 50.43,71.35 R15.1
N$9
  Top 0.254: 87.49,70.2 LED9.A 87.26,71.35 R17.1
N$10
  Top 0.254: 13.83,98.65 LED10.A 13.6,99.8 R19.1
N$11
  Top 0.254: 50.66,98.65 LED11.A 50.43,99.8 R21.1
N$12
  Top 0.254: 87.49,98.65 LED12.A 87.26,99.8 R23.1
RTS
  Top 0.254: U2.2 U2.3 15.13,18.2 15.13,15.88 | 15.13,15.88 15.13,14.68 R3.2 | JP9.4 9.53,18.29 11.94,15.88 15.13,15.88
RTS1
  Top 0.254: U1.2 U1.3 51.96,18.2 51.96,15.88 | 51.96,15.88 51.96,14.68 R1.2 | JP19.4 46.35,18.29 48.77,15.88 51.96,15.88
RTS2
  Top 0.254: U3.2 U3.3 88.79,18.2 88.79,15.88 | 88.79,15.88 88.79,14.68 R5.2 | JP30.4 83.19,18.29 85.6,15.88 88.79,15.88
RTS3
  Top 0.254: U4.2 U4.3 15.13,46.65 15.13,44.32 | 15.13,44.32 15.13,43.13 R7.2 | JP41.4 9.53,46.74 11.94,44.32 15.13,44.32
RTS4
  Top 0.254: U5.2 U5.3 51.96,46.65 51.96,44.32 | 51.96,44.32 51.96,43.13 R9.2 | JP52.4 46.35,46.74 48.77,44.32 51.96,44.32
RTS5
  Top 0.254: U6.2 U6.3 88.79,46.65 88.79,44.32 | 88.79,44.32 88.79,43.13 R11.2 | JP63.4 83.19,46.74 85.6,44.32 88.79,44.32
RTS6
  Top 0.254: U7.2 U7.3 15.13,75.09 15.13,72.77 | 15.13,72.77 15.13,71.57 R13.2 | JP74.4 9.53,75.18 11.94,72.77 15.13,72.77
RTS7
  Top 0.254: U8.2 U8.3 51.96,75.09 51.96,72.77 | 51.96,72.77 51.96,71.57 R15.2 | JP85.4 46.35,75.18 48.77,72.77 51.96,72.77
RTS8
  Top 0.254: U9.2 U9.3 88.79,75.09 88.79,72.77 | 88.79,72.77 88.79,71.57 R17.2 | JP96.4 83.19,75.18 85.6,72.77 88.79,72.77
RTS9
  Top 0.254: U10.2 U10.3 15.13,103.54 15.13,101.22 | 15.13,101.22 15.13,100.02 R19.2 | JP107.4 9.53,103.63 11.94,101.22 15.13,101.22
RTS10
  Top 0.254: U11.2 U11.3 51.96,103.54 51.96,101.22 | 51.96,101.22 51.96,100.02 R21.2 | JP118.4 46.35,103.63 48.77,101.22 51.96,101.22
RTS11
  Top 0.254: U12.2 U12.3 88.79,103.54 88.79,101.22 | 88.79,101.22 88.79,100.02 R23.2 | JP129.4 83.19,103.63 85.6,101.22 88.79,101.22
RX-I
  Top 0.254: U2.4 16.38,20.19 15.75,20.83 13.21,20.83 10.67,23.37 JP9.2
RX-I1
  Top 0.254: U1.4 53.21,20.19 52.58,20.83 50.04,20.83 47.5,23.37 JP19.2
RX-I2
  Top 0.254: U3.4 90.04,20.19 89.41,20.83 86.87,20.83 84.33,23.37 JP30.2
RX-I3
  Top 0.254: U4.4 16.38,48.64 15.75,49.28 13.21,49.28 10.67,51.82 JP41.2
RX-I4
  Top 0.254: U5.4 53.21,48.64 52.58,49.28 50.04,49.28 47.5,51.82 JP52.2
RX-I5
  Top 0.254: U6.4 90.04,48.64 89.41,49.28 86.87,49.28 84.33,51.82 JP63.2
RX-I6
  Top 0.254: U7.4 16.38,77.09 15.75,77.72 13.21,77.72 10.67,80.26 JP74.2
RX-I7
  Top 0.254: U8.4 53.21,77.09 52.58,77.72 50.04,77.72 47.5,80.26 JP85.2
RX-I8
  Top 0.254: U9.4 90.04,77.09 89.41,77.72 86.87,77.72 84.33,80.26 JP96.2
RX-I9
  Top 0.254: U10.4 16.38,105.54 15.75,106.17 13.21,106.17 10.67,108.71 JP107.2
RX-I10
  Top 0.254: U11.4 53.21,105.54 52.58,106.17 50.04,106.17 47.5,108.71 JP118.2
RX-I11
  Top 0.254: U12.4 90.04,105.54 89.41,106.17 86.87,106.17 84.33,108.71 JP129.2
TX-O
  Top 0.254: U2.1 12.57,20.19 11.94,20.83 JP9.3
TX-O1
  Top 0.254: U1.1 49.4,20.19 48.77,20.83 JP19.3
TX-O2
  Top 0.254: U3.1 86.23,20.19 85.6,20.83 JP30.3
TX-O3
  Top 0.254: U4.1 12.57,48.64 11.94,49.28 JP41.3
TX-O4
  Top 0.254: U5.1 49.4,48.64 48.77,49.28 JP52.3
TX-O5
  Top 0.254: U6.1 86.23,48.64 85.6,49.28 JP63.3
TX-O6
  Top 0.254: U7.1 12.57,77.09 11.94,77.72 JP74.3
TX-O7
  Top 0.254: U8.1 49.4,77.09 48.77,77.72 JP85.3
TX-O8
  Top 0.254: U9.1 86.23,77.09 85.6,77.72 JP96.3
TX-O9
  Top 0.254: U10.1 12.57,105.54 11.94,106.17 JP107.3
TX-O10
  Top 0.254: U11.1 49.4,105.54 48.77,106.17 JP118.3
TX-O11
  Top 0.254: U12.1 86.23,105.54 85.6,106.17 JP129.3
VCC
  Top 0.254: U2.8 12.57,24.68 C3.1 9.87,25.44 JP9.1
VCC1
  Top 0.254: U1.8 49.4,24.68 C1.1 46.7,25.44 JP19.1
VCC2
  Top 0.254: U3.8 86.23,24.68 C2.1 83.53,25.44 JP30.1
VCC3
  Top 0.254: U4.8 12.57,53.12 C4.1 9.87,53.89 JP41.1
VCC4
  Top 0.254: U5.8 49.4,53.12 C5.1 46.7,53.89 JP52.1
VCC5
  Top 0.254: U6.8 86.23,53.12 C6.1 83.53,53.89 JP63.1
VCC6
  Top 0.254: U7.8 12.57,81.57 C7.1 9.87,82.33 JP74.1
VCC7
  Top 0.254: U8.8 49.4,81.57 C8.1 46.7,82.33 JP85.1
VCC8
  Top 0.254: U9.8 86.23,81.57 C9.1 83.53,82.33 JP96.1
VCC9
  Top 0.254: U10.8 12.57,110.02 C10.1 9.87,110.78 JP107.1
VCC10
  Top 0.254: U11.8 49.4,110.02 C11.1 46.7,110.78 JP118.1
VCC11
  Top 0.254: U12.8 86.23,110.02 C12.1 83.53,110.78 JP129.1

## Text on the board
Bottom: V10 | V10 | V10 | V10 | V10 | V10 | V10 | V10 | V10 | V10 | V10 | V10
Dimension: Route Out | Route Out | Route Out | Route Out | Route Out | Route Out | Route Out | Route Out | Route Out
tPlace: RS485 | Breakout | RS485 | Breakout | RS485 | Breakout | B | B | B | A | A | A | G | G | G | RTS | RTS | RTS | 5 | 3 | 2 | 1 | 5 | 3 | 2 | 1 | 5 | 3 | 2 | 1 | RS485 | Breakout | RS485 | Breakout | RS485 | Breakout | B | B | B | A | A | A | G | G | G | RTS | RTS | RTS | 5 | 3 | 2 | 1 | 5 | 3 | 2 | 1 | 5 | 3 | 2 | 1 | RS485 | Breakout | RS485 | Breakout | RS485 | Breakout | B | B | B | A | A | A | G | G | G | RTS | RTS | RTS | 5 | 3 | 2 | 1 | 5 | 3 | 2 | 1 | 5 | 3 | 2 | 1 | RS485 | Breakout | RS485 | Breakout | RS485 | Breakout | B | B | B | A | A | A | G | G | G | RTS | RTS | RTS | 5 | 3 | 2 | 1 | 5 | 3 | 2 | 1 | 5 | 3 | 2 | 1
bPlace: 3-5V | 3-5V | 3-5V | RX-I | B | RX-I | B | RX-I | B | TX-O | A | TX-O | A | TX-O | A | RTS | G | RTS | G | RTS | G | GND | GND | GND | 2 | 1 | 2 | 1 | 2 | 1 | 5 | 3 | 5 | 3 | 5 | 3 | 3-5V | 3-5V | 3-5V | RX-I | B | RX-I | B | RX-I | B | TX-O | A | TX-O | A | TX-O | A | RTS | G | RTS | G | RTS | G | GND | GND | GND | 2 | 1 | 2 | 1 | 2 | 1 | 5 | 3 | 5 | 3 | 5 | 3 | 3-5V | 3-5V | 3-5V | RX-I | B | RX-I | B | RX-I | B | TX-O | A | TX-O | A | TX-O | A | RTS | G | RTS | G | RTS | G | GND | GND | GND | 2 | 1 | 2 | 1 | 2 | 1 | 5 | 3 | 5 | 3 | 5 | 3 | 3-5V | 3-5V | 3-5V | RX-I | B | RX-I | B | RX-I | B | TX-O | A | TX-O | A | TX-O | A | RTS | G | RTS | G | RTS | G | GND | GND | GND | 2 | 1 | 2 | 1 | 2 | 1 | 5 | 3 | 5 | 3 | 5 | 3